# Altium PCB ADE_PCB.PcbDoc
Units mm, origin at the board's own origin, x right, y up, seen from the top; angles counter-clockwise.
Board outline 656.97 x 210.06 mm, 2 copper layers (Top Layer, Bottom Layer); 34 components, 30 nets, 358 pads, 0 vias.
Unrouted connection lines stored in the file: 8.
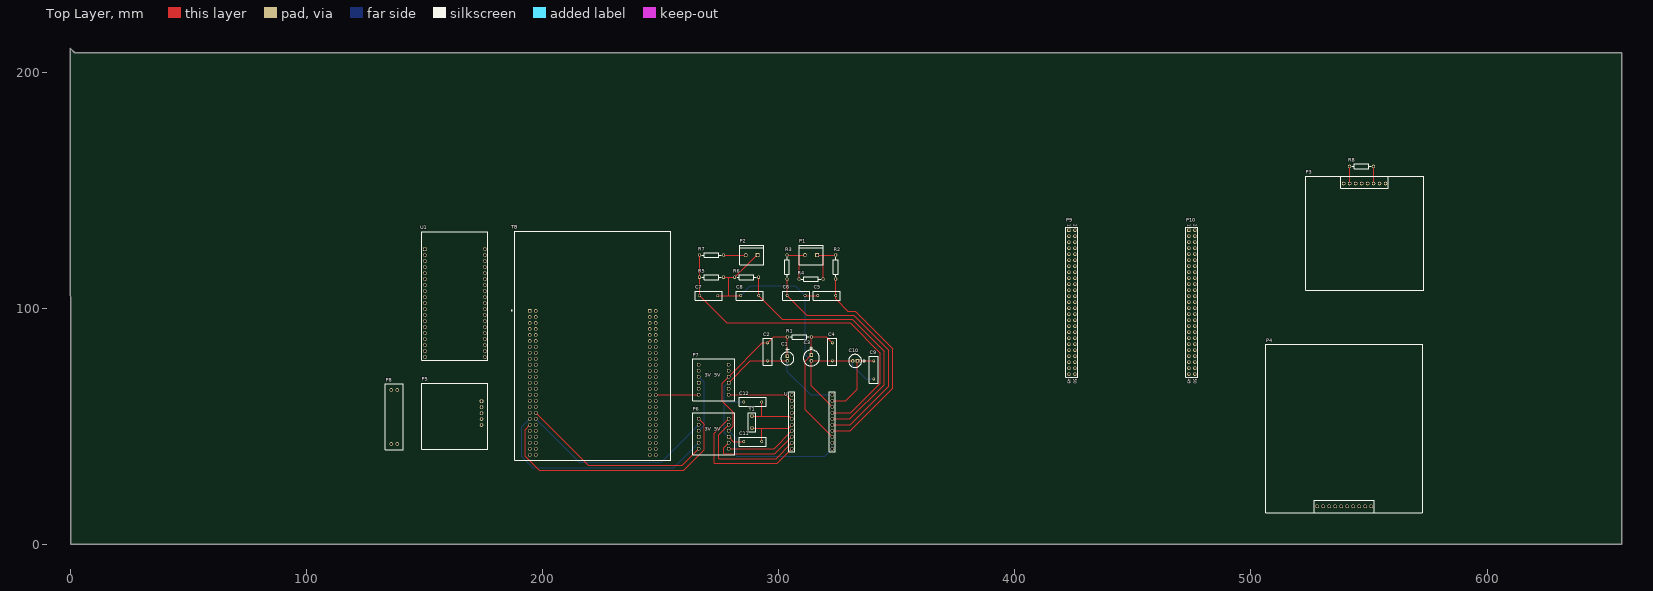
[diagram p0: Top Layer view]
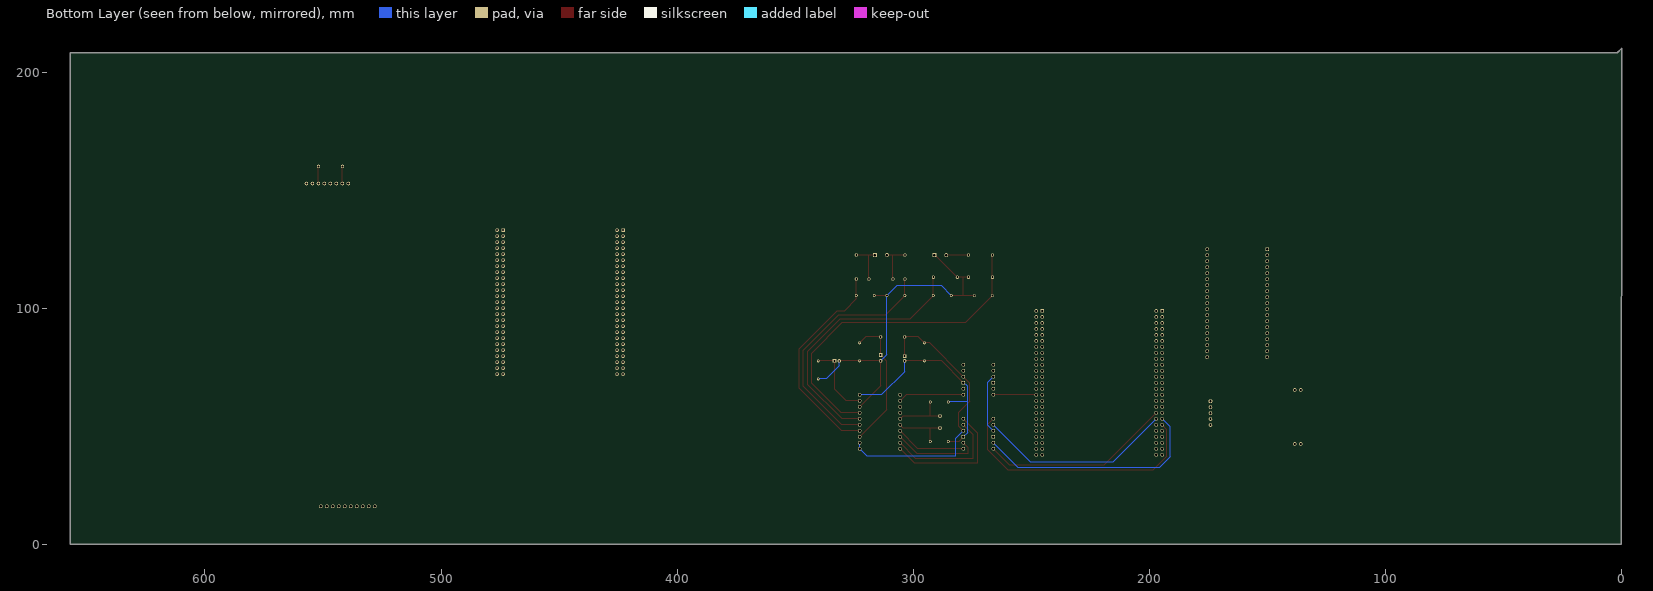
[diagram p1: Bottom Layer view, seen from below]

## Layer stack, top to bottom
Top Solder: solder mask 0.0102, Solder Resist, Dk 3.5
Top Layer: signal copper 0.0356
Dielectric 1: dielectric 0.32, FR-4, Dk 4.8
Bottom Layer: signal copper 0.0356
Bottom Solder: solder mask 0.0102, Solder Resist, Dk 3.5

## Board outline
0,210.058 1.778,208.28 656.971,208.28 656.971,0 0.127,0

## Design rules (kind name [scope] priority, off if disabled: settings)
Clearance [All] p1: gap=0.254 ignorepadtopadclearanceinfootprint=FALSE except(0: Arc-Hole Track-Hole SMDPad-Hole THPad-Hole Via-Hole Fill-Hole Poly-Hole Region-Hole Text-Hole)
PolygonConnect [All] p1: connectstyle=Relief reliefconductorwidth=0.254 reliefentries=4 polygonreliefangle="90 Angle" airgapwidth=0.254
RoutingVias [All] p1: holewidth=0.711 width=1.27 viastyle="Through Hole" minholewidth=0.711 minwidth=1.27 maxholewidth=0.711 maxwidth=1.27
SolderMaskExpansion [All] p1: expansion=0.102
Width [All] p1: maxlimit=1 minlimit=0.3 preferedwidth=0.5
30 further rules are at their usual default settings.

## Classes and differential pairs
component class LCD_Keypad: P3 P4 P9 P10 P? R8
component class ADE_Sche: C1 C2 C3 C4 C5 C6 C7 C8 C9 C10 C11 C12 P1 P2 P5 P6 P7 P8 R1 R2 R3 R4 R5 R6 R7 TB U U1 Y1

## Components (designator, comment, footprint, x,y, rotation, side; value= is the part's Value field where it differs from the comment)
C1 "Cap Pol1" "Tu hóa 10uF 50v" 303.657,78.724 r270 top value=10uF
C2 "Cap" RAD-0.3 295.275,81.534 r90 top value=100nF
C3 "Cap Pol1" "Tu hóa 220uF 10 or 16V" 313.817,78.974 r270 top value=220uF
C4 "Cap" RAD-0.3 322.707,81.534 r90 top value=100nF
C5 "Cap" RAD-0.3 320.294,105.41 r180 top value=33nF
C6 "Cap" RAD-0.3 307.34,105.41 r180 top value=33nF
C7 "Cap" RAD-0.3 270.256,105.41 r0 top value=33nF
C8 "Cap" RAD-0.3 287.655,105.41 r180 top value=33nF
C9 "Cap" RAD-0.3 340.233,73.914 r90 top value=100nF
C10 "Cap Pol1" "Tu hóa 10uF 50v" 332.343,77.724 r180 top value=10uF
C11 "Cap" RAD-0.3 288.925,43.561 r0 top value=22pF
C12 "Cap" RAD-0.3 288.925,60.325 r0 top value=22pF
P1 "282837-2" TE_282837-2 313.69,122.555 r180 top
P2 "282837-2" TE_282837-2 288.544,122.555 r180 top
P3 "LCD5110" "LCD 5110" 548.132,133.35 r0 top
P4 "Keypad" "Keypad 4x4" 529.336,16.129 r0 top
P5 "DS1307" DS1307 151.257,65.786 r180 top
P6 "Logic 3-5" "Logic level 3-5" 266.065,53.236 r0 top
P7 "Logic 3-5" "Logic level 3-5" 266.065,76.096 r0 top
P8 "Voltage 5-3.3" "AMS1117 Circuit" 138.43,45.085 r90 top
P9 "Header 25X2" HDR2X25 422.91,133.096 r270 top
P10 "Header 25X2" HDR2X25 473.71,133.096 r270 top
R1 "Res2" AXIAL-0.4 308.737,87.852 r180 top value=10R
R2 "Res2" AXIAL-0.4 324.104,117.475 r270 top value=1K
R3 "Res2" AXIAL-0.4 303.53,117.475 r270 top value=1K
R4 "Res2" AXIAL-0.4 313.69,112.395 r0 top value=5R
R5 "Res2" AXIAL-0.4 271.526,113.157 r0 top value=1K
R6 "Res2" AXIAL-0.4 286.385,113.157 r180 top value=1K
R7 "Res2" AXIAL-0.4 271.526,122.555 r180 top value=1M
R8 "Res2" AXIAL-0.4 546.862,160.147 r0 top value=4K7
TB "STM32F4DISCOVERY" MODULE_STM32F4DISCOVERY 221.234,84.201 r0 top
U "ADE7753" ADE7753_alter 314.071,52.119 r180 top
U1 "ESP32-DEVKITC-32D" MODULE_ESP32-DEVKITC-32D 162.814,105.283 r0 top
Y1 "XTAL" "3.5795 mhz crystal" 288.671,51.816 r270 top

## Footprints (in the part's own frame and the unit in brackets; to place one, negate y for a bottom-side part, rotate by r counter-clockwise, add the part's x,y. Pads: shape width x height; smd on the part's side, far side on the other; paste and mask are expansions set on the pad)
"3.5795 mhz crystal" [mil]
  round 60 hole 31.5: 1(-100,0) 1(-100,0) 2(100,0)
  silkscreen extent -155,-60 165,60
ADE7753_alter [mil]
  round 60 hole 39.37 mask+3.94: 1(-340,458.98) 2(-340,358.98) 3(-340,258.98) 4(-340,158.98) 5(-340,58.98) 6(-340,-41.02) 7(-340,-141.02) 8(-340,-241.02) 9(-340,-341.02) 10(-340,-441.02) 11(335,-441.02) 12(335,-341.02) 13(335,-241.02) 14(335,-141.02) 15(335,-41.02) 16(335,58.98) 17(335,158.98) 18(335,258.98) 19(335,358.98) 20(335,458.98)
  Top Layer lines w11.81: 335,158.98 335,153.98 ; 335,-141.02 335,-116.02 310,-141.02 ; -325,153.98 -330,148.98 -340,138.98 -340,158.98
  silkscreen extent -390,-491 385,509
"AMS1117 Circuit" [mil] "4 pins, 25x11mm"
  round 60 hole 39.37 mask+3.94: 1(-100,100) 2(800,100) 3(-100,0) 4(800,0)
  silkscreen extent -200,-100 900,200
AXIAL-0.4 [mm] "Axial Device, Thru-Hole; 2 Leads; 0.4 in Pin Spacing"
  round 1.4 hole 0.85: 1(-5.08,0) 2(5.08,0)
  silkscreen extent -4.06,-1.02 4.06,1.02
DS1307 [mil] "Tiny RTC DS1307"
  round 60 hole 39.37 mask+3.94: 1(-900,600) 2(-900,500) 3(-900,400) 4(-900,300)
  rrect50% 60x60 hole 39.37 mask+3.94: 5(-900,200)
  silkscreen extent -1000,-100 100,1000
HDR2X25 [mm] "Connector; Header; 25x2 Position"
  rect 1.5x1.5 hole 0.9: 1(0,0)
  round 1.5 hole 0.9: 2(0,2.54) 3(2.54,0) 4(2.54,2.54) 5(5.08,0) 6(5.08,2.54) 7(7.62,0) 8(7.62,2.54) 9(10.16,0) 10(10.16,2.54) 11(12.7,0) 12(12.7,2.54) 13(15.24,0) 14(15.24,2.54) 15(17.78,0) 16(17.78,2.54) 17(20.32,0) 18(20.32,2.54) 19(22.86,0) 20(22.86,2.54) 21(25.4,0) 22(25.4,2.54) 23(27.94,0) 24(27.94,2.54) 25(30.48,0) 26(30.48,2.54) 27(33.02,0) 28(33.02,2.54) 29(35.56,0) 30(35.56,2.54) 31(38.1,0) 32(38.1,2.54) 33(40.64,0) 34(40.64,2.54) 35(43.18,0) 36(43.18,2.54) 37(45.72,0) 38(45.72,2.54) 39(48.26,0) 40(48.26,2.54) 41(50.8,0) 42(50.8,2.54) 43(53.34,0) 44(53.34,2.54) 45(55.88,0) 46(55.88,2.54) 47(58.42,0) 48(58.42,2.54) 49(60.96,0) 50(60.96,2.54)
  silkscreen extent -1.27,-1.27 62.23,3.81
"Keypad 4x4" [mil] "ban phim c?ng 10 pins"
  round 60 hole 39.37 mask+3.94: 1(-50,0) 2(50,0) 3(150,0) 4(250,0) 5(350,0) 6(450,0) 7(550,0) 8(650,0) 9(750,0) 10(850,0)
  silkscreen extent -906,-106 1700,2700
"LCD 5110" [mil] "Break out board, 8 pins"
  round 60 hole 39.37 mask+3.94: 1(-350,767.4) 2(-250,767.4) 3(-150,767.4) 4(-50,767.4) 5(50,767.4) 6(150,767.4) 7(250,767.4) 8(350,767.4)
  silkscreen extent -984,-1010 984,893
"Logic level 3-5" [mil] "4 channels , 12 pins"
  round 60 hole 39.37 mask+3.94: 1(0,0) 1(0,0) 2(500,0) 3(0,-100) 4(500,-100) 5(0,-200) 6(500,-200) 9(0,-400) 10(500,-400) 11(0,-500) 12(500,-500)
  rect 60x60 hole 39.37 mask+3.94: 7(0,-300) 8(500,-300)
  silkscreen extent -100,-600 600,100
MODULE_ESP32-DEVKITC-32D [mm]
  rect 1.56x1.56 hole 1.04: 1(-12.7,19.76)
  round 1.56 hole 1.04: 2(-12.7,17.22) 3(-12.7,14.68) 4(-12.7,12.14) 5(-12.7,9.6) 6(-12.7,7.06) 7(-12.7,4.52) 8(-12.7,1.98) 9(-12.7,-0.56) 10(-12.7,-3.1) 11(-12.7,-5.64) 12(-12.7,-8.18) 13(-12.7,-10.72) 14(-12.7,-13.26) 15(-12.7,-15.8) 16(-12.7,-18.34) 17(-12.7,-20.88) 18(-12.7,-23.42) 19(-12.7,-25.96) 20(12.7,19.76) 21(12.7,17.22) 22(12.7,14.68) 23(12.7,12.14) 24(12.7,9.6) 25(12.7,7.06) 26(12.7,4.52) 27(12.7,1.98) 28(12.7,-0.56) 29(12.7,-3.1) 30(12.7,-5.64) 31(12.7,-8.18) 32(12.7,-10.72) 33(12.7,-13.26) 34(12.7,-15.8) 35(12.7,-18.34) 36(12.7,-20.88) 37(12.7,-23.42) 38(12.7,-25.96)
  silkscreen extent -13.95,-27.25 13.95,27.15
MODULE_STM32F4DISCOVERY [mm]
  rect 1.508x1.508 hole 1: P1_1(-26.67,14.68) P2_1(24.13,14.68)
  round 1.508 hole 1: P1_2(-24.13,14.68) P1_3(-26.67,12.14) P1_4(-24.13,12.14) P1_5(-26.67,9.6) P1_6(-24.13,9.6) P1_7(-26.67,7.06) P1_8(-24.13,7.06) P1_9(-26.67,4.52) P1_10(-24.13,4.52) P1_11(-26.67,1.98) P1_12(-24.13,1.98) P1_13(-26.67,-0.56) P1_14(-24.13,-0.56) P1_15(-26.67,-3.1) P1_16(-24.13,-3.1) P1_17(-26.67,-5.64) P1_18(-24.13,-5.64) P1_19(-26.67,-8.18) P1_20(-24.13,-8.18) P1_21(-26.67,-10.72) P1_22(-24.13,-10.72) P1_23(-26.67,-13.26) P1_24(-24.13,-13.26) P1_25(-26.67,-15.8) P1_26(-24.13,-15.8) P1_27(-26.67,-18.34) P1_28(-24.13,-18.34) P1_29(-26.67,-20.88) P1_30(-24.13,-20.88) P1_31(-26.67,-23.42) P1_32(-24.13,-23.42) P1_33(-26.67,-25.96) P1_34(-24.13,-25.96) P1_35(-26.67,-28.5) P1_36(-24.13,-28.5) P1_37(-26.67,-31.04) P1_38(-24.13,-31.04) P1_39(-26.67,-33.58) P1_40(-24.13,-33.58) P1_41(-26.67,-36.12) P1_42(-24.13,-36.12) P1_43(-26.67,-38.66) P1_44(-24.13,-38.66) P1_45(-26.67,-41.2) P1_46(-24.13,-41.2) P1_47(-26.67,-43.74) P1_48(-24.13,-43.74) P1_49(-26.67,-46.28) P1_50(-24.13,-46.28) P2_2(26.67,14.68) P2_3(24.13,12.14) P2_4(26.67,12.14) P2_5(24.13,9.6) P2_6(26.67,9.6) P2_7(24.13,7.06) P2_8(26.67,7.06) P2_9(24.13,4.52) P2_10(26.67,4.52) P2_11(24.13,1.98) P2_12(26.67,1.98) P2_13(24.13,-0.56) P2_14(26.67,-0.56) P2_15(24.13,-3.1) P2_16(26.67,-3.1) P2_17(24.13,-5.64) P2_18(26.67,-5.64) P2_19(24.13,-8.18) P2_20(26.67,-8.18) P2_21(24.13,-10.72) P2_22(26.67,-10.72) P2_23(24.13,-13.26) P2_24(26.67,-13.26) P2_25(24.13,-15.8) P2_26(26.67,-15.8) P2_27(24.13,-18.34) P2_28(26.67,-18.34) P2_29(24.13,-20.88) P2_30(26.67,-20.88) P2_31(24.13,-23.42) P2_32(26.67,-23.42) P2_33(24.13,-25.96) P2_34(26.67,-25.96) P2_35(24.13,-28.5) P2_36(26.67,-28.5) P2_37(24.13,-31.04) P2_38(26.67,-31.04) P2_39(24.13,-33.58) P2_40(26.67,-33.58) P2_41(24.13,-36.12) P2_42(26.67,-36.12) P2_43(24.13,-38.66) P2_44(26.67,-38.66) P2_45(24.13,-41.2) P2_46(26.67,-41.2) P2_47(24.13,-43.74) P2_48(26.67,-43.74) P2_49(24.13,-46.28) P2_50(26.67,-46.28)
  silkscreen extent -34.61,-48.5 33,48.5
RAD-0.3 [mm] "Radial Cap, Thru-Hole; 2 Leads; 0.3 in Pin Spacing"
  round 1.2 hole 0.7: 1(-3.81,0) 2(3.81,0)
  silkscreen extent -5.71,-1.91 5.71,1.91
TE_282837-2 [mm]
  rect 1.65x1.65 hole 1.1: 1(-2.54,0)
  round 1.65 hole 1.1: 2(2.54,0)
  silkscreen extent -5.08,-4.1 5.08,4.1
"Tu hóa 10uF 50v" [mm] "5x11mm, lead space 2mm"
  rrect10% 1.524x1.524 hole 0.8: 1(-1,0)
  round 1.524 hole 0.8: 2(1,0)
  silkscreen extent -4.57,-2.75 2.75,2.75
"Tu hóa 220uF 10 or 16V" [mm] "6.3x11mm, lead space 2.5mm"
  rrect10% 1.524x1.524 hole 0.8: 1(-1.25,0)
  round 1.524 hole 0.8: 2(1.25,0)
  silkscreen extent -4.83,-3.4 3.4,3.4

## Part data
C1 C3 C10: "Polarized Capacitor (Radial)", LatestRevisionDate=17-Jul-2002, LatestRevisionNote="Re-released for DXP Platform.", PackageDescription="Polarized Capacitor (Radial); 2 Leads", PackageReference=RB7.6-15, Published=8-Jun-2000, Publisher="Altium Limited"
C2 C4 C5 C6 C7 C8 C9 C11 C12: "Capacitor", LatestRevisionDate=17-Jul-2002, LatestRevisionNote="Re-released for DXP Platform.", PackageDescription="Radial Cap, Thru-Hole; 2 Leads; 0.3 in Pin Spacing", PackageReference=RAD-0.3, Published=8-Jun-2000, Publisher="Altium Limited"
P1 P2: "Connector Terminal Blocks Receptacle 2 Position 5.08mm Solder Straight Thru-Hole 13.5A/Contact", Package=None, Digi-Key_Part_Number=A113320-ND, Digi-Key_Purchase_URL=https://www.digikey.in/product-detail/en/te-connectivity-amp-connectors/282837-2/A113320-ND/2187973?utm_source=snapeda&utm_medium=aggregator&utm_campaign=symbol, MF="TE Connectivity", MP=282837-2, SnapEDA_Link=https://www.snapeda.com/parts/282837-2/TE%20Connectivity%20AMP%20Connectors/view-part/2549980/?ref=snap, TE_purchase_URL=https://www.te.com/usa-en/product-282837-2.html?te_bu=Cor&te_type=disp&te_campaign=seda_glo_cor-seda-global-disp-prtnr-fy19-seda-model-bom-cta_sma-317_1&elqCampaignId=32493
P3: library part "Header 8", "Header, 8-Pin", LatestRevisionDate=17-Jul-2002, LatestRevisionNote="Re-released for DXP Platform.", Publisher="Altium Limited"
P4: library part "Header 10", "Header, 10-Pin", LatestRevisionDate=17-Jul-2002, LatestRevisionNote="Re-released for DXP Platform.", Publisher="Altium Limited"
P5: library part "Header 5", "Header, 5-Pin", LatestRevisionDate=17-Jul-2002, LatestRevisionNote="Re-released for DXP Platform.", Publisher="Altium Limited"
P6 P7: library part "Header 6X2", "Header, 6-Pin, Dual row", LatestRevisionDate=17-Jul-2002, LatestRevisionNote="Re-released for DXP Platform.", Publisher="Altium Limited"
P8: library part "Header 2X2", "Header, 2-Pin, Dual row", LatestRevisionDate=17-Jul-2002, LatestRevisionNote="Re-released for DXP Platform.", Publisher="Altium Limited"
P9 P10: "Header, 25-Pin, Dual row", LatestRevisionDate=17-Jul-2002, LatestRevisionNote="Re-released for DXP Platform.", Publisher="Altium Limited"
R1 R2 R3 R4 R5 R6 R7 R8: "Resistor", LatestRevisionDate=17-Jul-2002, LatestRevisionNote="Re-released for DXP Platform.", PackageDescription="Axial Device, Thru-Hole; 2 Leads; 0.4 in Pin Spacing", PackageReference=AXIAL-0.4, Published=8-Jun-2000, Publisher="Altium Limited"
TB: "STM32F407VGT6 Discovery STM32F4 ARM® Cortex®-M4 MCU 32-Bit Embedded Evaluation Board", Package=None, Availability=Unavailable, MF=STMicroelectronics, MP=STM32F4DISCOVERY, Price=None, SnapEDA_Link=https://www.snapeda.com/parts/STM32F4DISCOVERY/STMicroelectronics/view-part/46335/?ref=snap
U: "IC ENERGY METERING 1PHASE 20SSOP", Package="SSOP-20 Analog Devices", Digi-Key_Part_Number=ADE7753ARSZRLCT-ND, MF="Analog Devices", MP=ADE7753, SnapEDA_Link=https://www.snapeda.com/parts/ADE7753/Analog%20Devices%20Inc./view-part/3209960/?ref=snap
U1: "- Transceiver; 802.11 b/g/n _Wi-Fi, WiFi, WLAN_, Bluetooth® Smart Ready 4.x Dual Mode For Use With ESP-WROOM-32", Package=None, Availability=Unavailable, MF="Espressif Systems", MP=ESP32-DEVKITC-32D, Price=None, SnapEDA_Link=https://www.snapeda.com/parts/ESP32-DEVKITC-32D/Espressif%20Systems/view-part/2777395/?ref=snap
Y1: "Crystal Oscillator", LatestRevisionDate=17-Jul-2002, LatestRevisionNote="Re-released for DXP Platform.", PackageDescription="Crystal, Thru-Hole; 2 Leads; Body 3.1 x 8.2 mm (Dia.xH)", PackageReference=R38, Published=8-Jun-2000, Publisher="Altium Limited"

## Nets (pads, with @x,y where several pads share a name; then routed paths per layer and width w, separated by ;. In a path a pad name is that pad's centre, name@x,y a point inside that pad or via, vN(x,y) a via of type N, cw(c..) or ccw(c..) an arc to the next point about the centre after c; other vN are vias at no path point)
3V: P3.6 P6.5 P7.5 P8.2 R8.2 TB.P1_3 | length 32.2
  Top Layer w0.3: P3.6 R8.2
  Bottom Layer w0.3: P6.5 268.478,50.569 268.478,68.603 P7.5
5V: C1.1 C2.2 P6.6 P7.6 P8.1 R1.2 U.1 U.2 | length 123.4
  Top Layer w0.3: P6.6 280.67,50.061 280.67,56.007 276.098,60.579 276.098,68.349 P7.6 293.093,85.344 C2.2 297.783,87.852 R1.2 C1.1
  Bottom Layer w0.3: P6.6 281.94,44.981 281.94,37.338 319.584,37.338 U.1 U.2
ADE_MISO_3V: P6.3 TB.P1_38 | length 83.2
  Bottom Layer w0.3: TB.P1_38 215.467,34.798 250.167,34.798 P6.3
ADE_MISO_5V: P6.4 U.19 | length 49.9
  Top Layer w0.3: P6.4 274.574,46.505 274.574,36.322 298.883,36.322 U.19
ADE_MOSI_3V: P6.1 TB.P1_39 | length 110.4
  Top Layer w0.3: TB.P1_39 192.532,48.589 192.532,37.338 198.501,31.369 259.842,31.369 268.478,40.005 268.478,50.823 P6.1@266.065,53.236
ADE_MOSI_5V: P6.2 U.20 | length 56.9
  Top Layer w0.3: P6.2 272.669,47.14 272.669,34.29 299.391,34.29 U.20
ADE_NSS_3V: P6.11 TB.P1_36 | length 81
  Top Layer w0.3: TB.P1_36 219.277,33.528 259.057,33.528 P6.11
ADE_NSS_5V: P6.12 U.17 | length 29.9
  Top Layer w0.3: P6.12 298.017,40.536 U.17
ADE_SCLK_3V: P6.9 TB.P1_37 | length 98.7
  Bottom Layer w0.3: TB.P1_37 191.135,49.732 191.135,37.084 195.707,32.512 255.501,32.512 P6.9
ADE_SCLK_5V: P6.10 U.18 | length 37.5
  Top Layer w0.3: P6.10 276.606,40.917 276.606,38.354 298.375,38.354 U.18
GND: C1.2 C2.1 C11.1 C12.1 P3.8 P6.8 P7.8 P8.3 P8.4 TB.P1_1 U.10 | length 96.2
  Top Layer w0.3: P6.8 280.82,43.561 C11.1 ; P7.8 288.013,77.724 C2.1 C1.2
  Bottom Layer w0.3: P6.8 276.987,47.394 276.987,60.325 ; P7.8 278.534,68.476 276.987,66.929 276.987,60.325 ; C12.1 276.987,60.325 ; C1.2 303.657,73.152 313.488,63.321 U.10
GND2: C3.2 C4.1 C5.2 C6.1 C7.2 C8.2 C9.1 C10.2 P2.1 R5.2 R6.2 U.8 | length 154.7
  Top Layer w0.3: C7.2 278.892,105.41 ; R5.2 278.892,113.157 ; C8.2 278.892,105.41 ; P2.1 290.703,122.555 R6.2 278.892,113.157 ; C6.1 C5.2 ; U.8 313.817,67.131 C3.2 C4.1 C10.2 ; 278.892,105.41 278.892,113.157
  Bottom Layer w0.3: C8.2 287.909,109.474 307.086,109.474 C6.1 311.15,80.391 C3.2 ; C10.2 331.343,75.565 336.804,70.104 C9.1
LCD_CE: P3.2 R8.1 | length 7.3
  Top Layer w0.3: P3.2 R8.1
LCD_DC: P3.3
LCD_DIN: P3.4
LCD_RST: P3.1
LCD_SCLK: P3.5
NetC3_1: C3.1 C4.2 R1.1 U.3 | length 58.1
  Top Layer w0.3: U.3 311.15,57.098 311.15,77.557 C3.1 R1.1 320.199,87.852 C4.2
NetC9_2: C9.2 C10.1 U.9 | length 31.6
  Top Layer w0.3: U.9 328.37,60.781 333.343,65.754 C10.1 C9.2
NetC11_2: C11.2 U.16 Y1.2 | length 23.2
  Top Layer w0.3: Y1.2 292.735,49.276 ; C11.2 292.735,49.276 ; U.16 304.217,49.276 292.735,49.276
NetC12_2: C12.2 U.15 Y1.1 | length 23.4
  Top Layer w0.3: Y1.1@288.671,54.356 292.735,54.356 ; C12.2 292.735,54.356 ; U.15 304.367,54.356 292.735,54.356
NetP1_1: P1.1 R2.1 R4.2 | length 18
  Top Layer w0.3: P1.1 318.77,122.555 ; R4.2 318.77,122.555 ; R2.1 318.77,122.555
NetP1_2: P1.2 R3.1 R4.1 | length 17.8
  Top Layer w0.3: R3.1 308.737,122.555 ; R4.1 308.61,122.428 308.737,122.555 ; P1.2 308.737,122.555
NetP2_2: P2.2 R7.1 | length 9.4
  Top Layer w0.3: R7.1 P2.2
V1N: C6.2 R3.2 U.5 | length 105.6
  Top Layer w0.3: R3.2 C6.2 311.785,97.155 331.724,97.155 346.583,82.296 346.583,66.929 330.275,50.621 U.5
V1P: C5.1 R2.2 U.4 | length 91.3
  Top Layer w0.3: U.4 330.275,48.081 348.361,66.167 348.361,82.931 332.486,98.806 329.311,98.806 324.104,104.013 C5.1 R2.2
V2N: C8.1 R6.1 U.6 | length 112.8
  Top Layer w0.3: R6.1 C8.1 301.498,95.377 331.089,95.377 344.678,81.788 344.678,67.691 330.148,53.161 U.6
V2P: C7.1 R5.1 R7.2 U.7 | length 142.1
  Top Layer w0.3: R7.2 R5.1 C7.1 278.003,93.853 330.2,93.853 343.027,81.026 343.027,68.326 330.402,55.701 U.7
ZX: P7.11 TB.P2_30 | length 18.2
  Top Layer w0.3: TB.P2_30 265.99,63.321 P7.11
ZX_5V: P7.12 U.12 | length 27.9
  Top Layer w0.3: P7.12 302.947,63.396 U.12
pads on no net: P3.7 P4.1 P4.2 P4.3 P4.4 P4.5 P4.6 P4.7 P4.8 P4.9 P4.10 P5.1 P5.2 P5.3 P5.4 P5.5 P6.7 P7.1 P7.2 P7.3 P7.4 P7.7 P7.9 P7.10 P9.1 P9.2 P9.3 P9.4 P9.5 P9.6 P9.7 P9.8 P9.9 P9.10 P9.11 P9.12 P9.13 P9.14 P9.15 P9.16 P9.17 P9.18 P9.19 P9.20 P9.21 P9.22 P9.23 P9.24 P9.25 P9.26 P9.27 P9.28 P9.29 P9.30 P9.31 P9.32 P9.33 P9.34 P9.35 P9.36 P9.37 P9.38 P9.39 P9.40 P9.41 P9.42 P9.43 P9.44 P9.45 P9.46 P9.47 P9.48 P9.49 P9.50 P10.1 P10.2 P10.3 P10.4 P10.5 P10.6 P10.7 P10.8 P10.9 P10.10 P10.11 P10.12 P10.13 P10.14 P10.15 P10.16 P10.17 P10.18 P10.19 P10.20 P10.21 P10.22 P10.23 P10.24 P10.25 P10.26 P10.27 P10.28 P10.29 P10.30 P10.31 P10.32 P10.33 P10.34 P10.35 P10.36 P10.37 P10.38 P10.39 P10.40 P10.41 P10.42 P10.43 P10.44 P10.45 P10.46 P10.47 P10.48 P10.49 P10.50 TB.P1_2 TB.P1_4 TB.P1_5 TB.P1_6 TB.P1_7 TB.P1_8 TB.P1_9 TB.P1_10 TB.P1_11 TB.P1_12 TB.P1_13 TB.P1_14 TB.P1_15 TB.P1_16 TB.P1_17 TB.P1_18 TB.P1_19 TB.P1_20 TB.P1_21 TB.P1_22 TB.P1_23 TB.P1_24 TB.P1_25 TB.P1_26 TB.P1_27 TB.P1_28 TB.P1_29 TB.P1_30 TB.P1_31 TB.P1_32 TB.P1_33 TB.P1_34 TB.P1_35 TB.P1_40 TB.P1_41 TB.P1_42 TB.P1_43 TB.P1_44 TB.P1_45 TB.P1_46 TB.P1_47 TB.P1_48 TB.P1_49 TB.P1_50 TB.P2_1 TB.P2_2 TB.P2_3 TB.P2_4 TB.P2_5 TB.P2_6 TB.P2_7 TB.P2_8 TB.P2_9 TB.P2_10 TB.P2_11 TB.P2_12 TB.P2_13 TB.P2_14 TB.P2_15 TB.P2_16 TB.P2_17 TB.P2_18 TB.P2_19 TB.P2_20 TB.P2_21 TB.P2_22 TB.P2_23 TB.P2_24 TB.P2_25 TB.P2_26 TB.P2_27 TB.P2_28 TB.P2_29 TB.P2_31 TB.P2_32 TB.P2_33 TB.P2_34 TB.P2_35 TB.P2_36 TB.P2_37 TB.P2_38 TB.P2_39 TB.P2_40 TB.P2_41 TB.P2_42 TB.P2_43 TB.P2_44 TB.P2_45 TB.P2_46 TB.P2_47 TB.P2_48 TB.P2_49 TB.P2_50 U1.1 U1.2 U1.3 U1.4 U1.5 U1.6 U1.7 U1.8 U1.9 U1.10 U1.11 U1.12 U1.13 U1.14 U1.15 U1.16 U1.17 U1.18 U1.19 U1.20 U1.21 U1.22 U1.23 U1.24 U1.25 U1.26 U1.27 U1.28 U1.29 U1.30 U1.31 U1.32 U1.33 U1.34 U1.35 U1.36 U1.37 U1.38 U.11 U.13 U.14

## Text inside footprints (layer, text, board x,y; h text height)
P6: Top Overlay "3V  5V" at 268.605,48.156 h1.52
P7: Top Overlay "3V  5V" at 268.605,71.016 h1.52
P9: Top Overlay "2" at 424.942,135.636 h1.27 r270; Top Overlay "1" at 422.402,135.636 h1.27 r270; Top Overlay "49" at 422.402,70.104 h1.27 r270; Top Overlay "50" at 424.942,70.104 h1.27 r270
P10: Top Overlay "2" at 475.742,135.636 h1.27 r270; Top Overlay "1" at 473.202,135.636 h1.27 r270; Top Overlay "49" at 473.202,70.104 h1.27 r270; Top Overlay "50" at 475.742,70.104 h1.27 r270